# Altium PCB PCB1.PcbDoc
Units mm, origin at the board's own origin, x right, y up, seen from the top; angles counter-clockwise.
Board outline 42.8 x 120.78 mm, 2 copper layers (Top Layer, Bottom Layer); 16 components, 9 nets, 48 pads, 0 vias.
Unrouted connection lines stored in the file: 1.
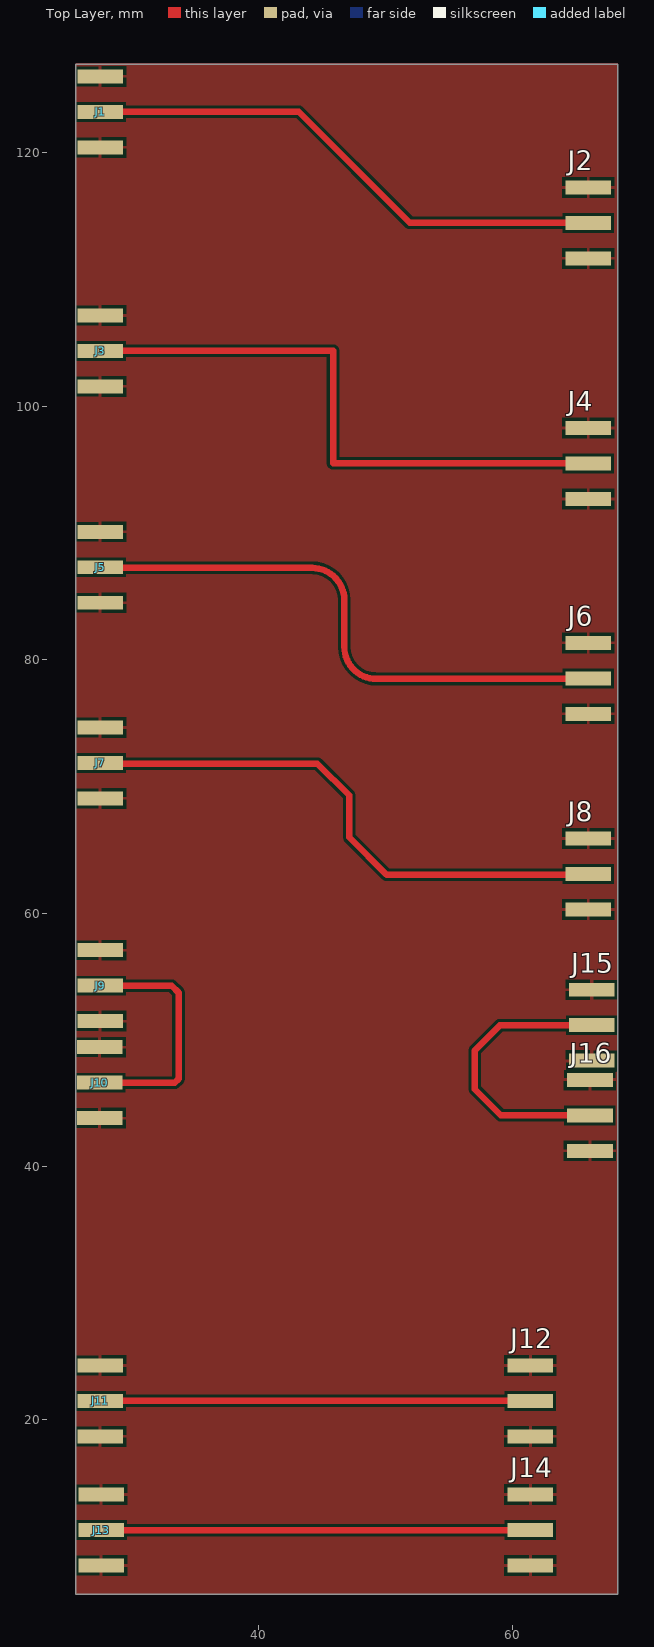
[diagram p0: Top Layer view]
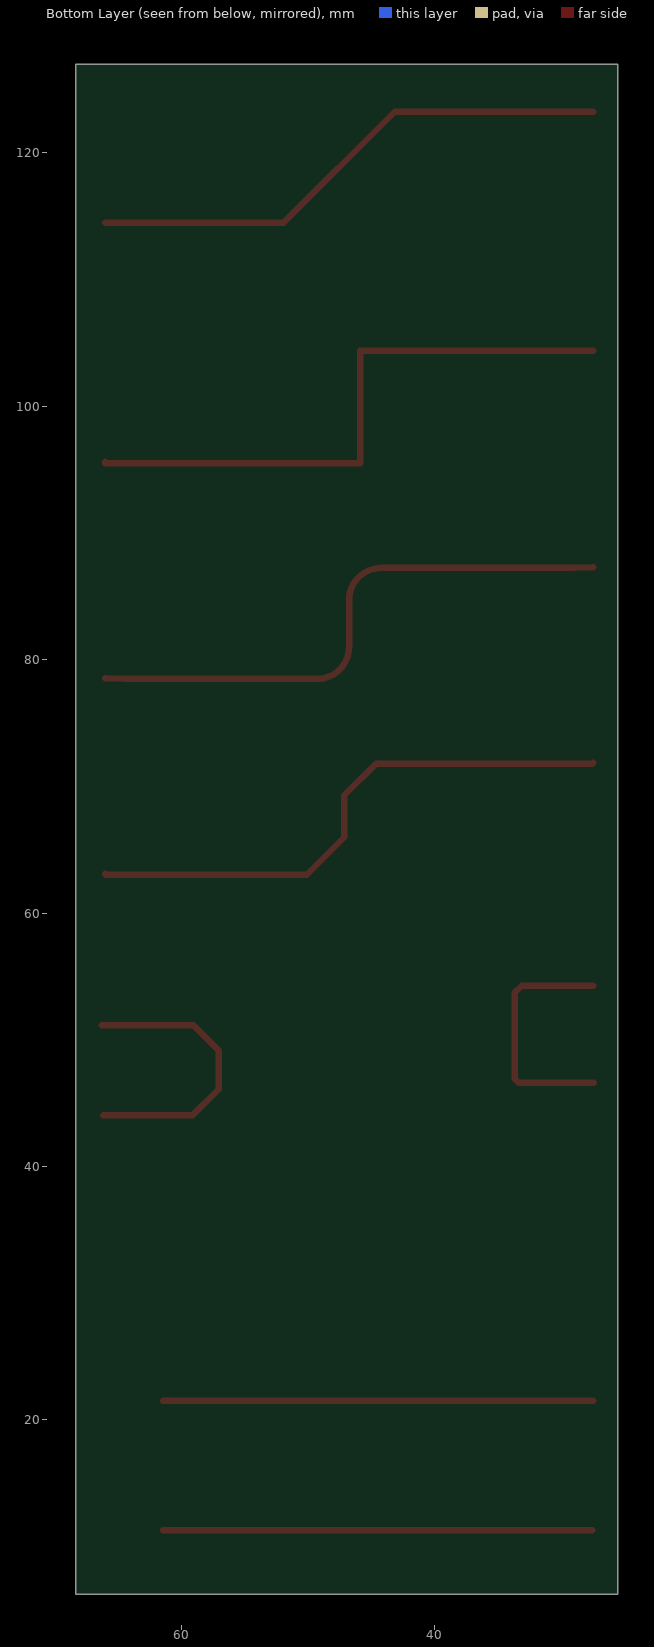
[diagram p1: Bottom Layer view, seen from below]
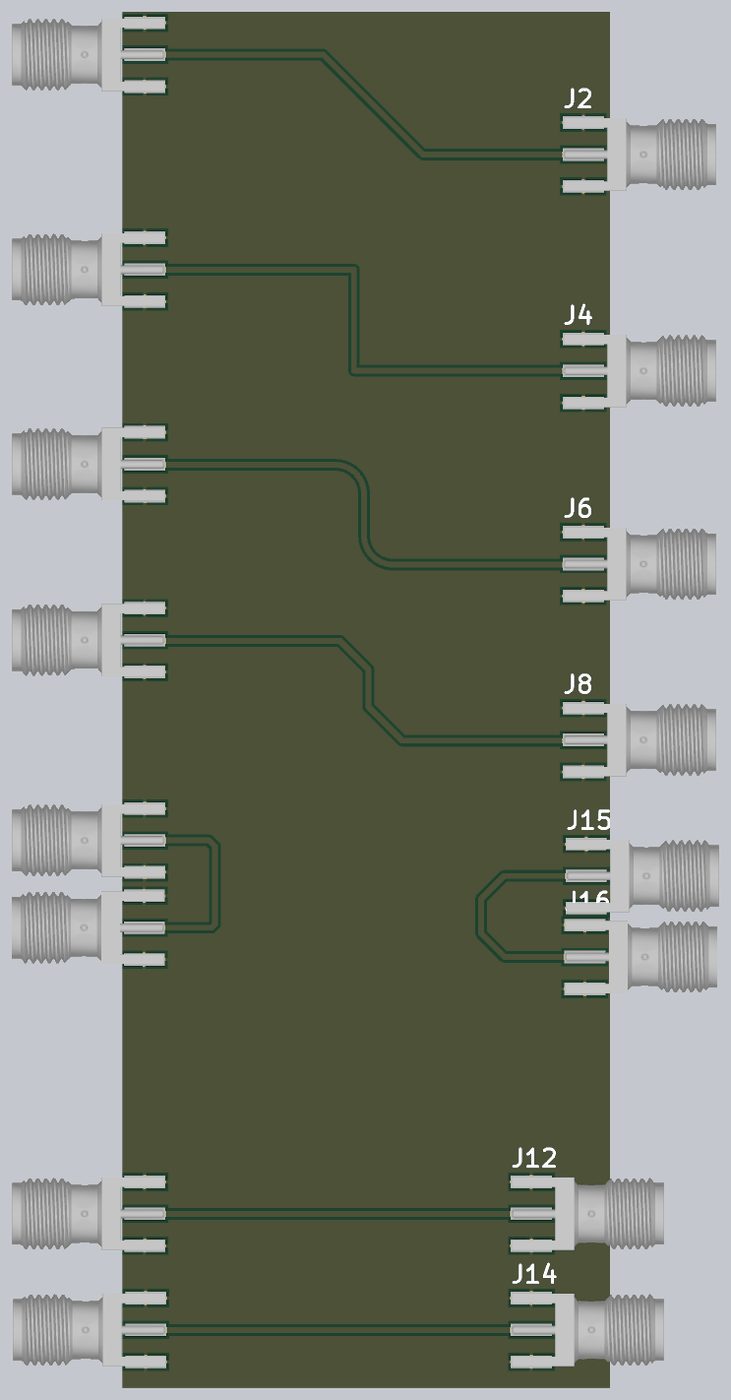
[diagram p2: 3D render of the assembled board from above, using the file's embedded part models]

## Layer stack, top to bottom
Top Solder: solder mask 0.0102, Solder Resist, Dk 3.5
Top Layer: signal copper 0.0356
Dielectric 1: dielectric 0.32, FR-4, Dk 4.8
Bottom Layer: signal copper 0.0356
Bottom Solder: solder mask 0.0102, Solder Resist, Dk 3.5

## Board outline
25.527,6.223 25.527,127 68.326,127 68.326,6.223

## Design rules (kind name [scope] priority, off if disabled: settings)
Clearance [All] p1: gap=0.254 ignorepadtopadclearanceinfootprint=FALSE except(0: Arc-Hole Track-Hole SMDPad-Hole THPad-Hole Via-Hole Fill-Hole Poly-Hole Region-Hole Text-Hole)
PolygonConnect [All] p1: connectstyle=Relief reliefconductorwidth=0.254 reliefentries=4 polygonreliefangle="90 Angle" airgapwidth=0.254
RoutingVias [All] p1: holewidth=0.711 width=1.27 viastyle="Through Hole" minholewidth=0.711 minwidth=1.27 maxholewidth=0.711 maxwidth=1.27
SolderMaskExpansion [All] p1: expansion=0.102 istentingtop=FALSE
Width [All] p1: maxlimit=12.7 minlimit=0.254 preferedwidth=0.254 minimp=50.000000 maximp=50.000000 favimp=50.000000
30 further rules are at their usual default settings.

## Components (designator, comment, footprint, x,y, rotation, side; value= is the part's Value field where it differs from the comment)
J1 "SMA" SMA 23.876,123.825 r180 top
J2 "SMA" SMA 69.596,113.862 r0 top
J3 "SMA" SMA 23.876,104.959 r180 top
J4 "SMA" SMA 69.596,94.869 r0 top
J5 "SMA" SMA 23.876,87.884 r180 top
J6 "SMA" SMA 69.596,77.921 r0 top
J7 "SMA" SMA 23.876,72.447 r180 top
J8 "SMA" SMA 69.596,62.484 r0 top
J9 "SMA" SMA 23.876,54.864 r180 top
J10 "SMA" SMA 23.832,47.209 r180 top
J11 "SMA" SMA 23.876,22.098 r180 top
J12 "SMA" SMA 65.024,20.898 r0 top
J13 "SMA" SMA 23.959,11.903 r180 top
J14 "SMA" SMA 65.024,10.703 r0 top
J15 "SMA" SMA 69.85,50.546 r0 top
J16 "SMA" SMA 69.723,43.434 r0 top

## Footprints (in the part's own frame and the unit in brackets; to place one, negate y for a bottom-side part, rotate by r counter-clockwise, add the part's x,y. Pads: shape width x height; smd on the part's side, far side on the other; paste and mask are expansions set on the pad)
SMA [mm]
  rect 3.6x1.1 smd mask+0.05: 1(-3.6,0.6) 2(-3.6,3.4) 2(-3.6,-2.2)
  body extent -5.3,-2.58 8.04,3.77, height 3.17

## Nets (pads, with @x,y where several pads share a name; then routed paths per layer and width w, separated by ;. In a path a pad name is that pad's centre, name@x,y a point inside that pad or via, vN(x,y) a via of type N, cw(c..) or ccw(c..) an arc to the next point about the centre after c; other vN are vias at no path point)
GND: J1.2 J2.2 J3.2 J4.2 J5.2 J6.2 J7.2 J8.2 J9.2 J10.2 J11.2 J12.2 J13.2 J14.2 J15.2 J16.2
NetJ1_1: J1.1 J2.1 | length 42.1
  Top Layer w0.508: J1.1 43.145,123.225 51.908,114.462 J2.1
NetJ3_1: J3.1 J4.1 | length 47.5
  Top Layer w0.508: J3.1 45.847,104.359 45.847,95.504 65.996,95.504 J4.1@65.996,95.596
NetJ5_1: J5.1 J6.1 | length 45.1
  Top Layer w0.508: J5.1 29.022,87.233 44.196,87.233 cw(c44.196,84.693) 46.736,84.693 46.736,81.01 ccw(c49.276,81.01) 49.276,78.47 64.45,78.47 J6.1
NetJ7_1: J7.1 J8.1 | length 44.1
  Top Layer w0.508: J7.1 27.536,71.787 44.612,71.787 47.117,69.282 47.117,65.98 50.073,63.024 65.936,63.024 J8.1
NetJ9_1: J9.1 J10.1 | length 19.6
  Top Layer w0.508: J10.1 33.357,46.609 33.655,46.907 33.655,53.721 33.112,54.264 J9.1
NetJ11_1: J11.1 J12.1 | length 33.9
  Top Layer w0.508: J11.1 J12.1
NetJ13_1: J13.1 J14.1 | length 33.9
  Top Layer w0.508: J13.1 J14.1
NetJ15_1: J15.1 J16.1 | length 23.1
  Top Layer w0.508: J16.1 59.09,44.034 57.023,46.101 57.023,49.149 59.02,51.146 J15.1

## Polygon pours and split planes (outlines as drawn)
GND on Top Layer "L2-No Net" (solid, remove dead copper, pour order 0): 25.527,127.046 68.326,127.046 68.326,6.269 25.527,6.269